# Altium PCB LAY-90818_A.brd.PcbDoc (part 2 of 6)
Units mil, origin at the board's own origin, x right, y up, seen from the top; angles counter-clockwise.
Board outline 4645.67 x 2165.35 mil, 4 copper layers (TOP, GND, POWER, BOTTOM), stack 60.45 mil thick; 414 components, 348 nets, 1441 pads, 720 vias.
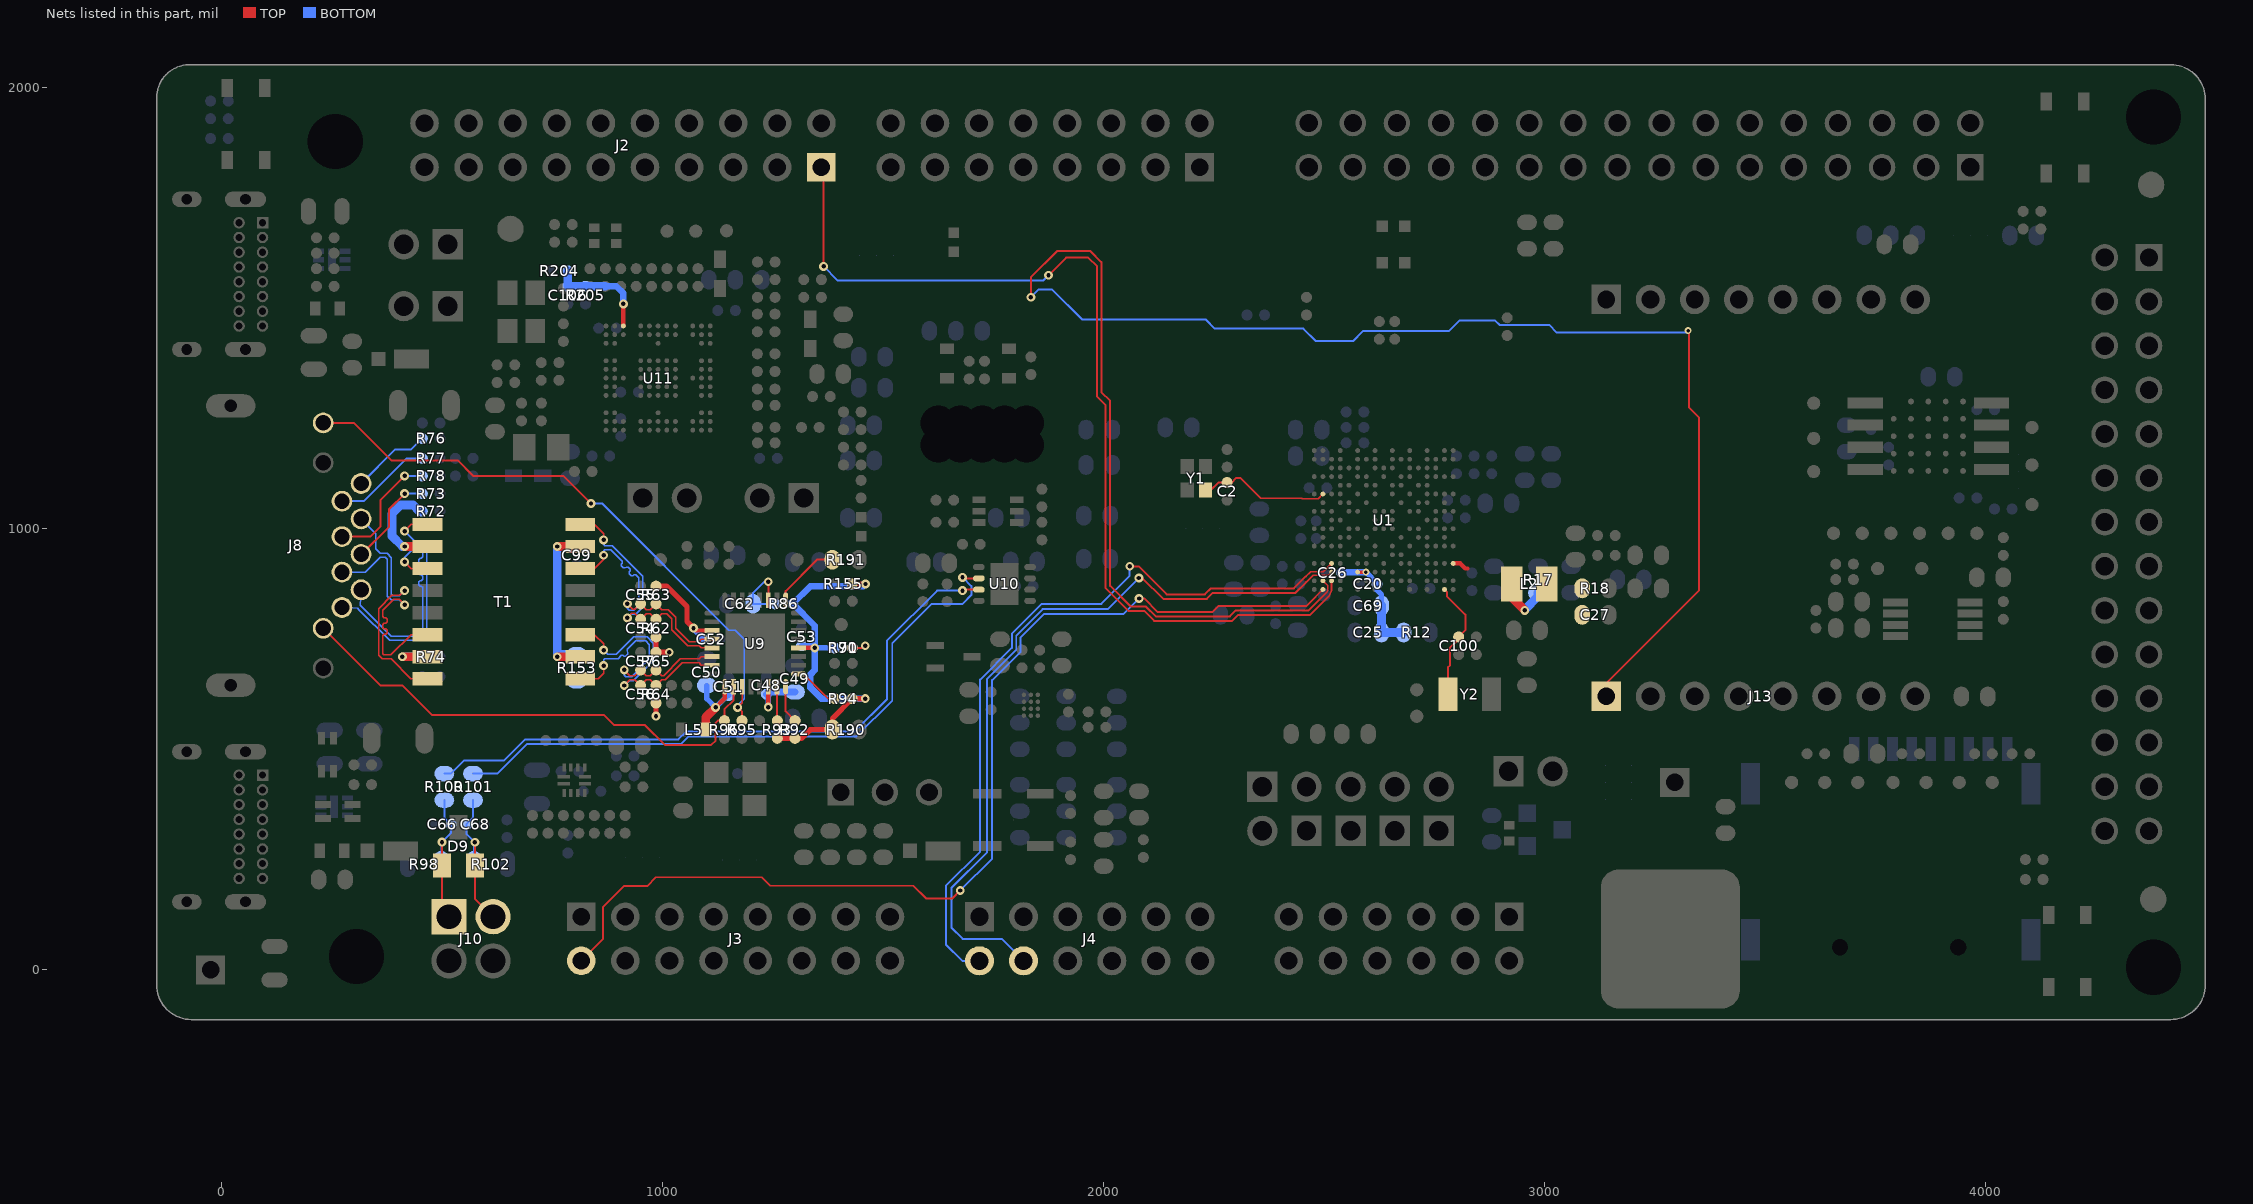
[diagram p4: the nets of this part, all layers, seen from the top]

## Footprints (in the part's own frame and the unit in brackets; to place one, negate y for a bottom-side part, rotate by r counter-clockwise, add the part's x,y. Pads: shape width x height; smd on the part's side, far side on the other; paste and mask are expansions set on the pad)
3PIN_0402_SOLDER_BLOB_JUMPER_SHORT_PSP_A#1 [mil] "3PIN_0402_SOLDER_BLOB_JUMPER_SHORT_PSP_A"
  oct 1x1 smd: 1(0,0) 2(-38.5,0) 3(38.5,0)
  TOP region: 15.72,15 37.53,15 45.03,12.99 50.52,7.5 52.53,0 50.52,-7.5 45.03,-12.99 37.53,-15 37.53,-15 15.72,-15 24.47,0
  TOP region: 15.72,15 37.53,15 45.03,12.99 50.52,7.5 52.53,0 50.52,-7.5 45.03,-12.99 37.53,-15 37.53,-15 15.72,-15 24.47,0
  TOP region: -15.72,-15 -37.53,-15 -45.03,-12.99 -50.52,-7.5 -52.53,0 -50.52,7.5 -45.03,12.99 -37.53,15 -37.53,15 -15.72,15 -24.47,0
  TOP region: -15.72,-15 -37.53,-15 -45.03,-12.99 -50.52,-7.5 -52.53,0 -50.52,7.5 -45.03,12.99 -37.53,15 -37.53,15 -15.72,15 -24.47,0
  TOP region: -8.8,15 -17.5,0 -8.8,-15 8.8,-15 17.5,0 8.8,15
  TOP region: -8.8,15 -17.5,0 -8.8,-15 8.8,-15 17.5,0 8.8,15
  silkscreen extent -60,-22 60,22, body extent -52,-15 52,15, height 150
3PIN_0402_SOLDER_BLOB_JUMPER_SHORT_PSP_A#2 [mil] "3PIN_0402_SOLDER_BLOB_JUMPER_SHORT_PSP_A"
  oct 1x1 smd: 1(0,0) 2(38.5,0) 3(-38.5,0)
  TOP region: 15.72,15 37.53,15 45.03,12.99 50.52,7.5 52.53,0 50.52,-7.5 45.03,-12.99 37.53,-15 37.53,-15 15.72,-15 24.47,0
  TOP region: 15.72,15 37.53,15 45.03,12.99 50.52,7.5 52.53,0 50.52,-7.5 45.03,-12.99 37.53,-15 37.53,-15 15.72,-15 24.47,0
  TOP region: -15.72,-15 -37.53,-15 -45.03,-12.99 -50.52,-7.5 -52.53,0 -50.52,7.5 -45.03,12.99 -37.53,15 -37.53,15 -15.72,15 -24.47,0
  TOP region: -15.72,-15 -37.53,-15 -45.03,-12.99 -50.52,-7.5 -52.53,0 -50.52,7.5 -45.03,12.99 -37.53,15 -37.53,15 -15.72,15 -24.47,0
  TOP region: 8.8,-15 17.5,0 8.8,15 -8.8,15 -17.5,0 -8.8,-15
  TOP region: 8.8,-15 17.5,0 8.8,15 -8.8,15 -17.5,0 -8.8,-15
  silkscreen extent -60,-23 60,23, body extent -52,-15 52,15, height 150
BGA98_0P5_7X7 [mil] "BGA98_0P5_7X7"
  round 11 smd: A1(-118.11,118.11) A2(-98.42,118.11) A3(-78.74,118.11) A5(-39.37,118.11) A6(-19.68,118.11) A7(0,118.11) A8(19.68,118.11) A9(39.37,118.11) A11(78.74,118.11) A12(98.42,118.11) A13(118.11,118.11) B1(-118.11,98.42) B2(-98.42,98.42) B3(-78.74,98.42) B5(-39.37,98.42) B6(-19.68,98.42) B7(0,98.42) B8(19.68,98.42) B9(39.37,98.42) B11(78.74,98.42) B12(98.42,98.42) B13(118.11,98.42) C1(-118.11,78.74) C2(-98.42,78.74) C7(0,78.74) C12(98.42,78.74) C13(118.11,78.74) E1(-118.11,39.37) E2(-98.42,39.37) E5(-39.37,39.37) E6(-19.68,39.37) E7(0,39.37) E8(19.68,39.37) E9(39.37,39.37) E12(98.42,39.37) E13(118.11,39.37) F1(-118.11,19.68) F2(-98.42,19.68) F5(-39.37,19.68) F6(-19.68,19.68) F8(19.68,19.68) F9(39.37,19.68) F12(98.42,19.68) F13(118.11,19.68) G1(-118.11,0) G2(-98.42,0) G3(-78.74,0) G5(-39.37,0) G6(-19.68,0) G8(19.68,0) G9(39.37,0) G11(78.74,0) G12(98.42,0) G13(118.11,0) H1(-118.11,-19.69) H2(-98.42,-19.69) H5(-39.37,-19.69) H6(-19.68,-19.69) H8(19.68,-19.69) H9(39.37,-19.69) H12(98.42,-19.69) H13(118.11,-19.69) J1(-118.11,-39.37) J2(-98.42,-39.37) J5(-39.37,-39.37) J6(-19.68,-39.37) J7(0,-39.37) J8(19.68,-39.37) J9(39.37,-39.37) J12(98.42,-39.37) J13(118.11,-39.37) L1(-118.11,-78.74) L2(-98.42,-78.74) L7(0,-78.74) L12(98.42,-78.74) L13(118.11,-78.74) M1(-118.11,-98.43) M2(-98.42,-98.43) M3(-78.74,-98.43) M5(-39.37,-98.43) M6(-19.68,-98.43) M7(0,-98.43) M8(19.68,-98.43) M9(39.37,-98.43) M11(78.74,-98.43) M12(98.42,-98.43) M13(118.11,-98.43) N1(-118.11,-118.11) N2(-98.42,-118.11) N3(-78.74,-118.11) N5(-39.37,-118.11) N6(-19.68,-118.11) N7(0,-118.11) N8(19.68,-118.11) N9(39.37,-118.11) N11(78.74,-118.11) N12(98.42,-118.11) N13(118.11,-118.11)
  silkscreen extent -193,-145 145,189, body extent -138,-138 138,138, height 150
BGA184_0P5_9X9_SM [mil] "BGA184_0P5_9X9_SM"
  round 11 smd: A1(-157.48,157.48) A2(-137.8,157.48) A4(-98.43,157.48) A6(-59.06,157.48) A8(-19.69,157.48) A10(19.69,157.48) A12(59.06,157.48) A14(98.43,157.48) A16(137.8,157.48) A17(157.48,157.48) B1(-157.48,137.8) B2(-137.8,137.8) B3(-118.11,137.8) B4(-98.43,137.8) B6(-59.06,137.8) B7(-39.37,137.8) B8(-19.69,137.8) B10(19.69,137.8) B11(39.37,137.8) B12(59.06,137.8) B14(98.43,137.8) B15(118.11,137.8) B16(137.8,137.8) B17(157.48,137.8) C3(-118.11,118.11) C4(-98.43,118.11) C5(-78.74,118.11) C6(-59.06,118.11) C8(-19.69,118.11) C9(0,118.11) C10(19.69,118.11) C12(59.06,118.11) C13(78.74,118.11) C14(98.43,118.11) C15(118.11,118.11) D1(-157.48,98.43) D2(-137.8,98.43) D3(-118.11,98.43) D4(-98.43,98.43) D6(-59.06,98.43) D7(-39.37,98.43) D9(0,98.43) D11(39.37,98.43) D12(59.06,98.43) D14(98.43,98.43) D15(118.11,98.43) D16(137.8,98.43) D17(157.48,98.43) E4(-98.43,78.74) E5(-78.74,78.74) E7(-39.37,78.74) E8(-19.69,78.74) E10(19.69,78.74) E11(39.37,78.74) E13(78.74,78.74) E14(98.43,78.74) F1(-157.48,59.06) F2(-137.8,59.06) F3(-118.11,59.06) F4(-98.43,59.06) F6(-59.06,59.06) F8(-19.69,59.06) F10(19.69,59.06) F12(59.06,59.06) F14(98.43,59.06) F15(118.11,59.06) F16(137.8,59.06) F17(157.48,59.06) G2(-137.8,39.37) G4(-98.43,39.37) G5(-78.74,39.37) G7(-39.37,39.37) G11(39.37,39.37) G13(78.74,39.37) G14(98.43,39.37) G16(137.8,39.37) H1(-157.48,19.69) H2(-137.8,19.69) H3(-118.11,19.69) H5(-78.74,19.69) H6(-59.06,19.69) H8(-19.69,19.69) H9(0,19.69) H10(19.69,19.69) H12(59.06,19.69) H13(78.74,19.69) H15(118.11,19.69) H16(137.8,19.69) H17(157.48,19.69) J3(-118.11,0) J4(-98.43,0) J8(-19.69,0) J10(19.69,0) J14(98.43,0) J15(118.11,0) K1(-157.48,-19.69) K2(-137.8,-19.69) K3(-118.11,-19.69) K5(-78.74,-19.69) K6(-59.06,-19.69) K8(-19.69,-19.69) K9(0,-19.69) K10(19.69,-19.69) K12(59.06,-19.69) K13(78.74,-19.69) K15(118.11,-19.69) K16(137.8,-19.69) K17(157.48,-19.69) L2(-137.8,-39.37) L4(-98.43,-39.37) L5(-78.74,-39.37) L7(-39.37,-39.37) L11(39.37,-39.37) L13(78.74,-39.37) L14(98.43,-39.37) L16(137.8,-39.37) M1(-157.48,-59.06) M2(-137.8,-59.06) M3(-118.11,-59.06) M4(-98.43,-59.06) M6(-59.06,-59.06) M8(-19.69,-59.06) M10(19.69,-59.06) M12(59.06,-59.06) M14(98.43,-59.06) M15(118.11,-59.06) M16(137.8,-59.06) M17(157.48,-59.06) N4(-98.43,-78.74) N5(-78.74,-78.74) N7(-39.37,-78.74) N8(-19.69,-78.74) N10(19.69,-78.74) N11(39.37,-78.74) N13(78.74,-78.74) N14(98.43,-78.74) P1(-157.48,-98.43) P2(-137.8,-98.43) P3(-118.11,-98.43) P4(-98.43,-98.43) P6(-59.06,-98.43) P7(-39.37,-98.43) P9(0,-98.43) P11(39.37,-98.43) P12(59.06,-98.43) P14(98.43,-98.43) P15(118.11,-98.43) P16(137.8,-98.43) P17(157.48,-98.43) R3(-118.11,-118.11) R4(-98.43,-118.11) R5(-78.74,-118.11) R6(-59.06,-118.11) R8(-19.69,-118.11) R9(0,-118.11) R10(19.69,-118.11) R12(59.06,-118.11) R13(78.74,-118.11) R14(98.43,-118.11) R15(118.11,-118.11) T1(-157.48,-137.8) T2(-137.8,-137.8) T3(-118.11,-137.8) T4(-98.43,-137.8) T6(-59.06,-137.8) T7(-39.37,-137.8) T8(-19.69,-137.8) T10(19.69,-137.8) T11(39.37,-137.8) T12(59.06,-137.8) T14(98.43,-137.8) T15(118.11,-137.8) T16(137.8,-137.8) T17(157.48,-137.8) U1(-157.48,-157.48) U2(-137.8,-157.48) U4(-98.43,-157.48) U6(-59.06,-157.48) U8(-19.69,-157.48) U10(19.69,-157.48) U12(59.06,-157.48) U14(98.43,-157.48) U16(137.8,-157.48) U17(157.48,-157.48)
  silkscreen extent -246,-184 184,248
CC0402_25#1 [mil] "CC0402_25"
  round 25 smd: 1(-20,0) 2(20,0)
  TOP keep-out region: 5,4 5,-4 4.5,-6.17 3.12,-7.91 1.11,-8.87 -1.11,-8.87 -3.12,-7.91 -4.5,-6.17 -5,-4 -5,-4 -5,4 -4.5,6.17 -3.12,7.91 -1.11,8.87 1.11,8.87 3.12,7.91 4.5,6.17 5,4
  silkscreen extent -4,-12 4,12, body extent -32,-13 32,13, height 150
CC0402_25#2 [mil] "CC0402_25"
  round 25 smd: 1(20,0) 2(-20,0)
  TOP keep-out region: -5,-4 -5,4 -4.5,6.17 -3.12,7.91 -1.11,8.87 1.11,8.87 3.12,7.91 4.5,6.17 5,4 5,4 5,-4 4.5,-6.17 3.12,-7.91 1.11,-8.87 -1.11,-8.87 -3.12,-7.91 -4.5,-6.17 -5,-4
  silkscreen extent -4,-12 4,12, body extent -32,-12 32,12, height 150
CC0603_OV#1 [mil] "CC0603_OV"
  oval 35x45 smd: 1(-30,0) 2(30,0)
  TOP keep-out region: -10,20 10,20 10,-20 -10,-20
  silkscreen extent -5,-25 5,25, body extent -48,-23 48,23, height 150
CC0603_OV#2 [mil] "CC0603_OV"
  oval 35x45 smd: 1(30,0) 2(-30,0)
  TOP keep-out region: 10,-20 -10,-20 -10,20 10,20
  silkscreen extent -5,-25 5,25, body extent -48,-22 48,22, height 150
CC0805_OV [mil] "CC0805_OV"
  oval 35x60 smd: 1(-38,0) 2(38,0)
  TOP keep-out region: 20.47,-4.49 18.52,-13.46 12.84,-20.67 4.59,-24.68 -4.59,-24.68 -12.84,-20.67 -18.52,-13.46 -20.47,-4.49 -20.47,-4.49 -20.47,4.49 -18.52,13.46 -12.84,20.67 -4.59,24.68 4.59,24.68 12.84,20.67 18.52,13.46 20.47,4.49 20.47,4.49
  silkscreen extent -10,-25 10,25, body extent -56,-30 56,30, height 150
CC1206_OV [mil] "CC1206_OV"
  oval 40x70 smd: 1(-60,0) 2(60,0)
  TOP keep-out region: -35,-35 35,-35 35,35 -35,35
  silkscreen extent -15,-30 15,30, body extent -80,-35 80,35, height 150
CON9_SDCARD_1P1_15P05X14P75_SM [mil] "CON9_SDCARD_1P1_15P05X14P75_SM"
  rect 24x55 smd: 1(-82.87,-399.65) 2(-39.57,-399.65) 3(3.74,-399.65) 4(47.05,-399.65) 5(90.35,-399.65) 6(133.66,-399.65) 7(176.97,-399.65) 8(220.28,-399.65) 9(263.58,-399.65)
  rect 43x94 smd: G1(317.91,-320.91) G2(-317.91,-320.91) G3(317.91,33.42) G4(-317.91,33.42)
  round 0 hole 37 unplated: ""(-115.16,50.15) ""(152.56,50.15)
  TOP keep-out region: 296.26,-260.68 296.26,-101.23 -105.32,-101.23 -105.32,-260.68
  BOTTOM keep-out region: 171.63,50.15 170.18,42.86 166.04,36.67 159.86,32.54 152.56,31.09 145.26,32.54 143.19,33.92 143.19,33.92 139.08,36.67 134.94,42.86 133.49,50.15 134.94,57.45 139.08,63.64 143.19,66.38 143.19,66.38 145.26,67.77 152.56,69.22 159.86,67.77 166.04,63.64 170.18,57.45 171.63,50.15
  BOTTOM keep-out region: -96.09,50.15 -97.54,42.86 -101.68,36.67 -107.86,32.54 -115.16,31.09 -122.45,32.54 -124.53,33.92 -124.53,33.92 -128.64,36.67 -132.77,42.86 -134.22,50.15 -132.77,57.45 -128.64,63.64 -124.53,66.38 -124.53,66.38 -122.45,67.77 -115.16,69.22 -107.86,67.77 -101.68,63.64 -97.54,57.45 -96.09,50.15
  Multi-Layer keep-out region: -81.37,50.15 -82.52,41.41 -85.9,33.26 -91.27,26.26 -98.26,20.89 -106.41,17.52 -115.16,16.37 -123.9,17.52 -132.05,20.89 -132.05,20.89 -139.05,26.26 -144.42,33.26 -147.79,41.41 -148.95,50.15 -147.79,58.9 -144.42,67.05 -139.05,74.05 -132.05,79.42 -132.05,79.42 -123.9,82.79 -115.16,83.94 -106.41,82.79 -98.26,79.42 -91.27,74.05 -85.9,67.05 -82.52,58.9 -81.37,50.15
  Multi-Layer keep-out region: 186.35,50.15 185.2,41.41 181.82,33.26 176.45,26.26 169.45,20.89 161.3,17.52 152.56,16.37 143.81,17.52 135.66,20.89 135.66,20.89 128.67,26.26 123.3,33.26 119.92,41.41 118.77,50.15 119.92,58.9 123.3,67.05 128.67,74.05 135.66,79.42 135.66,79.42 143.81,82.79 152.56,83.94 161.3,82.79 169.45,79.42 176.45,74.05 181.82,67.05 185.2,58.9 186.35,50.15
  silkscreen extent -304,-382 304,208, body extent -339,-427 339,427, height 150
CON12P_1P02_16P48X15P5_RA_TH [mil] "CON12P_1P02_16P48X15P5_RA_TH"
  round 47 hole 35: 1(140.55,212.62) 2(100.39,255.93) 3(60.24,212.62) 4(20.08,255.93) 5(-20.08,212.62) 6(-60.24,255.93) 7(-100.39,212.62) 8(-140.55,255.93) 9(-277.95,170.1) 10(-187.79,170.1) 11(187.8,170.1) 12(277.95,170.1)
  oval 53x112 hole 28 slot 87 at 90 deg: S1(316.54,-39.35) S2(-316.54,-39.35)
  BOTTOM keep-out region: -272.39,-207.69 -272.39,17.45 -293.73,27.87 -308.05,46.81 -312.27,70.18 -305.47,92.93 -289.12,110.16 -266.75,118.13 -266.75,118.13 266.78,118.13 290.55,112.28 308.86,96.03 317.51,73.13 314.49,48.83 300.52,28.73 278.8,17.45 278.8,17.45 278.8,-207.69
  BOTTOM keep-out region: -20.08,351.32 -0.41,357.38 20.08,359.43 20.08,359.43 20.09,359.43 40.57,357.38 60.24,351.32 60.24,351.32 79.91,357.38 100.39,359.43 100.39,359.43 100.39,359.43 137.9,352.39 170.31,332.24 193.21,301.72 193.21,301.72 214.03,285.52 230.07,264.57 230.07,264.57 231.48,263.93 232.87,263.27 232.87,263.27 254.83,270.98 277.95,273.6 277.94,273.6 277.95,273.6 317.56,265.72 351.14,243.29 373.57,209.71 381.45,170.1 381.45,170.1 372.26,127.46 346.33,92.4 346.33,92.4 386.17,70.74 413.38,34.46 423.03,-9.85 423.04,-9.84 423.04,-68.85 408.77,-122.1 369.78,-161.08 316.54,-175.35 263.29,-161.08 224.3,-122.1 210.04,-68.85 210.04,-68.85 210.04,-9.84 219.84,34.78 247.44,71.2 247.44,71.2 240.05,73.79 232.87,76.93 232.87,76.93 210.92,69.22 187.8,66.6 187.8,66.6 187.8,66.6 136.87,79.99 99.13,116.71 99.13,116.71 80.05,111.03 60.24,109.12 60.24,109.12 60.23,109.12 39.75,111.17 20.08,117.23 20.08,117.23 0.41,111.17 -20.08,109.12 -20.08,109.12 -40.56,111.17 -60.24,117.23 -60.24,117.23 -79.91,111.17 -100.39,109.12 -100.39,109.12 -100.39,109.12 -102.26,109.14 -104.12,109.19 -104.12,109.19 -140.85,77.86 -187.8,66.6 -187.79,66.6 -187.8,66.6 -210.92,69.22 -232.87,76.93 -232.87,76.93 -240.05,73.79 -247.44,71.2 -247.44,71.2 -219.84,34.78 -210.04,-9.85 -210.04,-9.85 -210.04,-68.85 -224.3,-122.1 -263.29,-161.08 -316.54,-175.35 -369.79,-161.08 -408.77,-122.1 -423.04,-68.85 -423.04,-68.85 -423.04,-9.85 -413.38,34.46 -386.17,70.74 -346.33,92.4 -346.33,92.4 -372.26,127.46 -381.45,170.1 -381.45,170.1 -373.57,209.71 -351.14,243.29 -317.56,265.72 -277.95,273.6 -277.95,273.6 -260.42,272.1 -243.39,267.66 -243.39,267.65 -226.01,314.31 -188.87,347.45 -140.55,359.43 -140.55,359.43 -140.54,359.43 -120.06,357.38 -100.39,351.32 -100.39,351.32 -80.72,357.38 -60.24,359.43 -60.24,359.43 -39.75,357.38 -20.08,351.32
  Multi-Layer keep-out region: -270.47,128.13 263.63,128.13 290.85,121.72 312.35,103.84 323.63,78.25 322.31,50.31 308.68,25.89 285.59,10.12 285.59,10.12 285.59,-217.69 -285.59,-217.69 -285.59,9.99 -308.35,24.82 -322.44,48.04 -325.06,75.08 -315.71,100.58 -296.23,119.51 -270.47,128.13
  silkscreen extent -331,-366 331,258, body extent -343,-359 343,279, height 150
CON16_USB_TYPE-C_RA_TH [mil] "CON16_USB_TYPE-C_RA_TH"
  rect 26x26 hole 16: A1(-117.13,125.94)
  round 26 hole 16: A4(-83.66,125.94) A5(-50.2,125.94) A6(-16.73,125.94) A7(16.73,125.94) A8(50.2,125.94) A9(83.66,125.94) A12(117.13,125.94) B1(117.13,72.79) B4(83.66,72.79) B5(50.2,72.79) B6(16.73,72.79) B7(-16.73,72.79) B8(-50.2,72.79) B9(-83.66,72.79) B12(-117.13,72.79)
  oval 35x94 hole 24 slot 83 at 90 deg: SH1(-170.28,87.36) SH2(170.28,87.36)
  oval 35x67 hole 24 slot 55 at 90 deg: SH3(-170.28,-45.71) SH4(170.28,-45.71)
  BOTTOM keep-out region: -72.78,-61.71 -85.84,-110.46 -121.53,-146.15 -170.28,-159.21 -219.03,-146.15 -254.71,-110.46 -267.78,-61.71 -267.78,-61.71 -267.78,-29.71 -265.14,-7.21 -257.39,14.07 -257.39,14.07 -265.14,35.36 -267.78,57.86 -267.78,57.86 -267.78,116.86 -260.7,153.32 -240.51,184.49 -210.13,205.84 -210.13,205.84 -210.13,218.94 -84.16,218.94 -83.66,218.94 -83.16,218.94 -83.16,218.94 -50.83,218.94 -50.2,218.94 -49.56,218.94 -49.56,218.94 -24.13,218.94 -24.13,218.65 -12.02,218.82 0,217.42 0,217.42 16.74,218.94 33.47,217.42 33.47,217.42 50.2,218.94 66.93,217.42 66.93,217.42 83.66,218.94 100.39,217.42 100.39,217.42 126.14,218.5 151.2,212.47 151.2,212.47 193.93,211.44 232.11,192.24 258.41,158.56 267.78,116.86 267.78,116.86 267.78,57.86 265.14,35.36 257.39,14.07 257.39,14.07 265.14,-7.21 267.78,-29.71 267.78,-29.71 267.78,-61.71 254.71,-110.46 219.03,-146.15 170.28,-159.21 121.53,-146.15 85.84,-110.46 72.78,-61.71 72.78,-61.71 72.78,-29.71 72.91,-24.67 73.3,-19.63 73.3,-19.63 70.1,-19.22 66.93,-18.69 66.93,-18.69 50.19,-20.21 33.46,-18.69 33.46,-18.69 16.73,-20.21 0,-18.69 0,-18.69 -16.74,-20.21 -33.47,-18.69 -33.47,-18.69 -50.2,-20.21 -66.93,-18.69 -66.93,-18.69 -70.11,-19.22 -73.3,-19.63 -73.3,-19.63 -72.91,-24.67 -72.78,-29.71 -72.78,-29.71
  silkscreen extent -195,-226 195,161, body extent -188,-219 188,154, height 150
CON_1X8_SKT_2P54_TH_126L [mil] "CON_1X8_SKT_2P54_TH_126L"
  rect 67x67 / inner round 67 / far side rect 67x67 hole 40: 1(0.05,349.98)
  round 67 hole 40: 2(0.05,249.98) 3(0.05,149.98) 4(0.05,49.98) 5(0.05,-50.02) 6(0.05,-150.02) 7(0.05,-250.02) 8(0.05,-350.02)
  BOTTOM keep-out region: -33.47,-383.49 33.54,-383.49 33.54,383.59 -33.47,383.59
  silkscreen extent -59,-422 59,422, body extent -52,-415 52,415, height 150
CON_2X8_SKT_100_TH [mil] "CON_2X8_SKT_100_TH"
  rect 65x65 / inner round 65 / far side rect 65x65 hole 40: 1(-350,50)
  round 65 hole 40: 2(-350,-50) 3(-250,50) 4(-250,-50) 5(-150,50) 6(-150,-50) 7(-50,50) 8(-50,-50) 9(50,50) 10(50,-50) 11(150,50) 12(150,-50) 13(250,50) 14(250,-50) 15(350,50) 16(350,-50)
  BOTTOM keep-out region: -462.5,-162.5 462.5,-162.5 462.5,162.5 -462.5,162.5
  silkscreen extent -422,-110 422,110, body extent -415,-103 415,105, height 150
CON_SKT2X6_TH_126L [mil] "CON_SKT2X6_TH_126L"
  rect 66x66 / inner round 66 / far side rect 66x66 hole 41: 1(250,-50)
  round 66 hole 41: 2(250,50) 3(150,-50) 4(150,50) 5(50,-50) 6(50,50) 7(-50,-50) 8(-50,50) 9(-150,-50) 10(-150,50) 11(-250,-50) 12(-250,50)
  BOTTOM keep-out region: -363,-163 363,-163 363,163 -363,163
  silkscreen extent -323,-112 323,112, body extent -316,-104 316,104, height 150
CON_SKT2X10_TH [mil] "CON_SKT2X10_TH"
  rect 65x65 / inner round 65 / far side rect 65x65 hole 40: 1(50,450)
  round 65 hole 40: 2(-50,450) 3(50,350) 4(-50,350) 5(50,250) 6(-50,250) 7(50,150) 8(-50,150) 9(50,50) 10(-50,50) 11(50,-50) 12(-50,-50) 13(50,-150) 14(-50,-150) 15(50,-250) 16(-50,-250) 17(50,-350) 18(-50,-350) 19(50,-450) 20(-50,-450)
  BOTTOM keep-out region: -162.5,-562.5 162.5,-562.5 162.5,562.5 -162.5,562.5
  silkscreen extent -110,-522 110,522, body extent -103,-514 103,515, height 150
CON_SKT2X14_TH_126L [mil] "CON_SKT2X14_TH_126L"
  rect 61x61 / inner round 61 / far side rect 61x61 hole 41: 1(50,650)
  round 61 hole 41: 2(-50,650) 3(50,550) 4(-50,550) 5(50,450) 6(-50,450) 7(50,350) 8(-50,350) 9(50,250) 10(-50,250) 11(50,150) 12(-50,150) 13(50,50) 14(-50,50) 15(50,-50) 16(-50,-50) 17(50,-150) 18(-50,-150) 19(50,-250) 20(-50,-250) 21(50,-350) 22(-50,-350) 23(50,-450) 24(-50,-450) 25(50,-550) 26(-50,-550) 27(50,-650) 28(-50,-650)
  BOTTOM lines w1: -160.5,-760.5 -160.5,760.5 160.5,760.5 160.5,-760.5 -160.5,-760.5
  silkscreen extent -110,-722 110,722
CON_SKT_32F_100_TH [mil] "CON_SKT_32F_100_TH"
  rect 60x60 / inner round 60 / far side rect 60x60 hole 41: 1(50,750)
  round 60 hole 41: 2(-50,750) 3(50,650) 4(-50,650) 5(50,550) 6(-50,550) 7(50,450) 8(-50,450) 9(50,350) 10(-50,350) 11(50,250) 12(-50,250) 13(50,150) 14(-50,150) 15(50,50) 16(-50,50) 17(50,-50) 18(-50,-50) 19(50,-150) 20(-50,-150) 21(50,-250) 22(-50,-250) 23(50,-350) 24(-50,-350) 25(50,-450) 26(-50,-450) 27(50,-550) 28(-50,-550) 29(50,-650) 30(-50,-650) 31(50,-750) 32(-50,-750)
  BOTTOM keep-out region: -160,-860 160,-860 160,860 -160,860
  silkscreen extent -110,-822 110,822, body extent -103,-815 103,815, height 150
ELECTRODE_8MM_SQ_CIR [mil] "ELECTRODE_8MM_SQ_CIR"
  rrect25% 314.96x314.96 smd: 1(0,0)
  silkscreen extent -164,-164 164,164, body extent -157,-157 157,157, height 150
HDR1X2_5P48X2P69#1 [mil] "HDR1X2_5P48X2P69"
  rect 69x69 / inner round 69 / far side rect 69x69 hole 44: 1(-50,0)
  round 69 hole 44: 2(50,0)
  BOTTOM keep-out region: 15.2,0 16.39,-9.01 19.86,-17.4 25.39,-24.61 32.6,-30.14 40.99,-33.61 50,-34.8 59.01,-33.61 67.4,-30.14 67.4,-30.14 74.61,-24.61 80.14,-17.4 83.61,-9.01 84.8,0 83.61,9.01 80.14,17.4 74.61,24.61 67.4,30.14 67.4,30.14 59.01,33.61 50,34.8 40.99,33.61 32.6,30.14 25.39,24.61 19.86,17.4 16.39,9.01 15.2,0
  BOTTOM keep-out region: -84.5,-34.5 -15.5,-34.5 -15.5,34.5 -84.5,34.5
  silkscreen extent -115,-60 115,60, body extent -108,-53 108,53, height 150
HDR1X2_5P48X2P69#2 [mil] "HDR1X2_5P48X2P69"
  rect 69x69 / inner round 69 / far side rect 69x69 hole 44: 1(-50,0)
  round 69 hole 44: 2(50,0)
  BOTTOM lines w1: -84.5,-34.5 -84.5,34.5 -15.5,34.5 -15.5,-34.5 -84.5,-34.5
  BOTTOM keep-out region: 84.8,0 83.61,9.01 80.14,17.4 74.61,24.61 67.4,30.14 59.01,33.61 50,34.8 40.99,33.61 32.6,30.14 32.6,30.14 25.39,24.61 19.86,17.4 16.39,9.01 15.2,0 16.39,-9.01 19.86,-17.4 25.39,-24.61 32.6,-30.14 32.6,-30.14 40.99,-33.61 50,-34.8 59.01,-33.61 67.4,-30.14 74.61,-24.61 80.14,-17.4 83.61,-9.01 84.8,0
  silkscreen extent -115,-60 115,60
HDR2X2_2P54_TH [mil] "HDR2X2_2P54_TH"
  rect 80x80 / inner round 80 / far side rect 80x80 hole 56: 1(-50,50)
  round 80 hole 56: 2(50,50) 3(-50,-50) 4(50,-50)
  BOTTOM keep-out region: -90,90 -90,10 -10,10 -10,90
  BOTTOM keep-out region: -9.65,-50 -11.03,-39.56 -15.06,-29.83 -21.47,-21.47 -29.83,-15.06 -39.56,-11.03 -50,-9.65 -60.44,-11.03 -70.17,-15.06 -70.17,-15.06 -78.53,-21.47 -84.94,-29.83 -88.97,-39.56 -90.35,-50 -88.97,-60.44 -84.94,-70.17 -78.53,-78.53 -70.17,-84.94 -70.17,-84.94 -60.44,-88.97 -50,-90.35 -39.56,-88.97 -29.83,-84.94 -21.47,-78.53 -15.06,-70.17 -11.03,-60.44 -9.65,-50
  BOTTOM keep-out region: 90.35,50 88.97,60.44 84.94,70.17 78.53,78.53 70.17,84.94 60.44,88.97 50,90.35 39.56,88.97 29.83,84.94 29.83,84.94 21.47,78.53 15.06,70.17 11.03,60.44 9.65,50 11.03,39.56 15.06,29.83 21.47,21.47 29.83,15.06 29.83,15.06 39.56,11.03 50,9.65 60.44,11.03 70.17,15.06 78.53,21.47 84.94,29.83 88.97,39.56 90.35,50
  BOTTOM keep-out region: 90.35,-50 88.97,-39.56 84.94,-29.83 78.53,-21.47 70.17,-15.06 60.44,-11.03 50,-9.65 39.56,-11.03 29.83,-15.06 29.83,-15.06 21.47,-21.47 15.06,-29.83 11.03,-39.56 9.65,-50 11.03,-60.44 15.06,-70.17 21.47,-78.53 29.83,-84.94 29.83,-84.94 39.56,-88.97 50,-90.35 60.44,-88.97 70.17,-84.94 78.53,-78.53 84.94,-70.17 88.97,-60.44 90.35,-50
  silkscreen extent -107,-107 107,107, body extent -100,-100 100,100, height 150
HDR101 [mil] "HDR101"
  rect 66x66 / inner round 66 / far side rect 66x66 hole 40: 1(0,0)
  BOTTOM keep-out region: -33,-33 33,-33 33,33 -33,33
  silkscreen extent -57,-57 57,57, body extent -50,-50 50,50, height 150
HDR103 [mil] "HDR103"
  rect 60x60 / inner round 60 / far side rect 60x60 hole 40: 1(0,99.75)
  round 60 hole 40: 2(0,-0.25) 3(0,-100.25)
  BOTTOM keep-out region: -30,129.75 -30,-100.25 -27.03,-113.27 -18.7,-123.7 -6.68,-129.5 6.68,-129.5 18.7,-123.7 27.03,-113.27 30,-100.25 30,-100.25 30,129.75
  silkscreen extent -57,-167 57,167, body extent -50,-160 50,160, height 150
HDR_5X2_FTSH_TH [mil] "HDR_5X2_FTSH_TH"
  oval 56x40 hole 80: 1(-25,100) 2(25,100) 3(-25,50) 4(25,50) 5(-25,0) 6(25,0) 7(-25,-50) 8(25,-50) 9(-25,-100) 10(25,-100)
  BOTTOM keep-out region: -61,-120 61,-120 61,120 -61,120
  silkscreen extent -77,-134 77,134, body extent -70,-127 70,127, height 150
IND4_CHOKE_0805_39H [mil] "IND4_CHOKE_0805_39H"
  rect 36x16 smd: 1(-33.46,-15.75) 2(33.47,-15.75) 3(33.47,15.75) 4(-33.46,15.75)
  silkscreen extent -50,-35 50,35, body extent -51,-28 51,28, height 150
IND_1P8X1MM_SM [mil] "IND_1P8X1MM_SM"
  rect 39x28 smd: 1(-33.28,0) 2(33.28,0)
  silkscreen extent -41,-27 41,27, body extent -53,-20 53,20, height 150
IND_0402 [mil] "IND_0402"
  round 25 smd: 1(-20,0) 2(20,0)
  silkscreen extent -12,-18 13,18
IND_0805 [mil] "IND_0805"
  rect 51x59 smd: 1(-38.5,0) 2(38.5,0)
  silkscreen extent -13,-42 13,42, body extent -64,-32 64,32, height 150
IND_1608 [mil] "IND_1608"
  rect 24x32 smd: 1(-27.65,0) 2(27.55,0)
  silkscreen extent -32,-26 30,26
IND_SPH2520 [mil] "IND_SPH2520"
  rect 48x79 smd: 1(-39.75,0) 2(39.75,0)
  silkscreen extent -55,-50 52,50, body extent -64,-43 64,43, height 150
LED4_2P7X2P6_SM [mil] "LED4_2P7X2P6_SM"
  rect 26x26 smd: 1(-41.3,-25.6) 2(41.3,-25.6) 3(41.3,25.6) 4(-41.3,25.6)
  silkscreen extent -60,-56 60,56, body extent -54,-49 54,49, height 150
LED_1P1_1P1X0P6_SM [mil] "LED_1P1_1P1X0P6_SM"
  rect 24x24 smd: A(21.65,0) C(-21.65,0)
  silkscreen extent -29,-63 29,19, body extent -34,-12 34,12, height 150
LED_1X0P6_SM [mil] "LED_1X0P6_SM"
  rect 20x24 smd: A(17.72,0) C(-17.72,0)
  silkscreen extent -28,-63 31,20, body extent -28,-13 28,13, height 150
MH125-160 [mil] "MH125-160"
  round 0 hole 125 unplated: 1(0,0)
  BOTTOM keep-out region: 62.8,0 61.6,12.25 58.02,24.03 52.22,34.89 44.41,44.41 34.89,52.22 24.03,58.02 12.25,61.6 0,62.8 -12.25,61.6 -24.03,58.02 -31.27,54.16 -31.27,54.16 -34.89,52.22 -44.41,44.41 -52.22,34.89 -58.02,24.03 -61.6,12.25 -62.8,0 -61.6,-12.25 -58.02,-24.03 -52.22,-34.89 -44.41,-44.41 -34.89,-52.22 -31.27,-54.16 -31.27,-54.16 -24.03,-58.02 -12.25,-61.6 0,-62.8 12.25,-61.6 24.03,-58.02 34.89,-52.22 44.41,-44.41 52.22,-34.89 58.02,-24.03 61.6,-12.25 62.8,0
  Multi-Layer keep-out region: 80.39,0 78.84,15.68 74.27,30.76 66.84,44.66 56.84,56.84 44.66,66.84 30.76,74.27 15.68,78.84 0,80.39 -15.68,78.84 -30.76,74.27 -40.02,69.32 -40.02,69.32 -44.66,66.84 -56.84,56.84 -66.84,44.66 -74.27,30.76 -78.84,15.68 -80.39,0 -78.84,-15.68 -74.27,-30.76 -66.84,-44.66 -56.84,-56.84 -44.66,-66.84 -40.02,-69.32 -40.02,-69.32 -30.76,-74.27 -15.68,-78.84 0,-80.39 15.68,-78.84 30.76,-74.27 44.66,-66.84 56.84,-56.84 66.84,-44.66 74.27,-30.76 78.84,-15.68 80.39,0
  Multi-Layer keep-out region: 80.39,0 78.84,15.68 74.27,30.76 66.84,44.66 56.84,56.84 44.66,66.84 30.76,74.27 15.68,78.84 0,80.39 -15.68,78.84 -30.76,74.27 -40.02,69.32 -40.02,69.32 -44.66,66.84 -56.84,56.84 -66.84,44.66 -74.27,30.76 -78.84,15.68 -80.39,0 -78.84,-15.68 -74.27,-30.76 -66.84,-44.66 -56.84,-56.84 -44.66,-66.84 -40.02,-69.32 -40.02,-69.32 -30.76,-74.27 -15.68,-78.84 0,-80.39 15.68,-78.84 30.76,-74.27 44.66,-66.84 56.84,-56.84 66.84,-44.66 74.27,-30.76 78.84,-15.68 80.39,0
  body extent -63,-63 63,63, height 150
OSC4_3P2X2P5_SM [mil] "OSC4_3P2X2P5_SM"
  rect 55x47 smd: 1(-43.29,-37.4) 2(43.33,-37.4) 3(43.33,37.4) 4(-43.29,37.4)
  silkscreen extent -78,-68 78,68, body extent -71,-61 71,61, height 150
PBGA24_1_6X8MM [mil] "PBGA24_1_6X8MM"
  round 13 smd: A2(-39.37,78.74) A3(0,78.74) A4(39.37,78.74) A5(78.74,78.74) B1(-78.74,39.37) B2(-39.37,39.37) B3(0,39.37) B4(39.37,39.37) B5(78.74,39.37) C1(-78.74,0) C2(-39.37,0) C3(0,0) C4(39.37,0) C5(78.74,0) D1(-78.74,-39.37) D2(-39.37,-39.37) D3(0,-39.37) D4(39.37,-39.37) D5(78.74,-39.37) E1(-78.74,-78.74) E2(-39.37,-78.74) E3(0,-78.74) E4(39.37,-78.74) E5(78.74,-78.74)
  silkscreen extent -127,-166 127,166
QFN32EP [mil] "QFN32EP"
  oval 35x11 smd: 1(-98.01,68.95) 8(-98.01,-68.95) 17(98.01,-68.95) 24(98.01,68.95)
  rect 35x11 smd: 2(-98.01,49.25) 3(-98.01,29.55) 4(-98.01,9.85) 5(-98.01,-9.85) 6(-98.01,-29.55) 7(-98.01,-49.25) 18(98.01,-49.25) 19(98.01,-29.55) 20(98.01,-9.85) 21(98.01,9.85) 22(98.01,29.55) 23(98.01,49.25)
  oval 11x35 smd: 9(-68.95,-98.01) 16(68.95,-98.01) 25(68.95,98.01) 32(-68.95,98.01)
  rect 11x35 smd: 10(-49.25,-98.01) 11(-29.55,-98.01) 12(-9.85,-98.01) 13(9.85,-98.01) 14(29.55,-98.01) 15(49.25,-98.01) 26(49.25,98.01) 27(29.55,98.01) 28(9.85,98.01) 29(-9.85,98.01) 30(-29.55,98.01) 31(-49.25,98.01)
  rect 136x136 smd: 33(0,0)
  silkscreen extent -126,-126 125,126, body extent -116,-116 116,116, height 150
R603-X2 [mil] "R603-X2"
  oval 35x45 smd: 1(-60,0) 2(0,0) 3(60,0)
  TOP keep-out region: 20,-20 20,20 40,20 40,-20
  TOP keep-out region: -40,-20 -40,20 -20,20 -20,-20
  Multi-Layer keep-out region: -60,-25 -60,25 0,25 0,-25
  silkscreen extent -85,-30 85,30, body extent -85,-30 85,30, height 150
RC0402_25#1 [mil] "RC0402_25"
  round 25 smd: 1(-20,0) 2(20,0)
  TOP keep-out region: 5,4 5,-4 4.5,-6.17 3.12,-7.91 1.11,-8.87 -1.11,-8.87 -3.12,-7.91 -4.5,-6.17 -5,-4 -5,-4 -5,4 -4.5,6.17 -3.12,7.91 -1.11,8.87 1.11,8.87 3.12,7.91 4.5,6.17 5,4
  body extent -32,-12 32,12, height 150
RC0402_25#2 [mil] "RC0402_25"
  round 25 smd: 1(20,0) 2(-20,0)
  TOP keep-out region: -5,-4 -5,4 -4.5,6.17 -3.12,7.91 -1.11,8.87 1.11,8.87 3.12,7.91 4.5,6.17 5,4 5,4 5,-4 4.5,-6.17 3.12,-7.91 1.11,-8.87 -1.11,-8.87 -3.12,-7.91 -4.5,-6.17 -5,-4
  body extent -32,-12 32,12, height 150
RC0603_OV#1 [mil] "RC0603_OV"
  oval 35x45 smd: 1(-30,0) 2(30,0)
  TOP keep-out region: -10,20 10,20 10,-20 -10,-20
  silkscreen extent -5,-5 5,5, body extent -48,-23 48,23, height 150
RC0603_OV#2 [mil] "RC0603_OV"
  oval 35x45 smd: 1(30,0) 2(-30,0)
  TOP keep-out region: 10,-20 -10,-20 -10,20 10,20
  silkscreen extent -5,-5 5,5, body extent -48,-22 48,22, height 150
RC0805_OV#1 [mil] "RC0805_OV"
  oval 35x60 smd: 1(-38,0) 2(38,0)
  TOP keep-out region: -20,25 20,25 20,-25 -20,-25
  silkscreen extent -10,-25 10,25, body extent -56,-30 56,30, height 150
RC0805_OV#2 [mil] "RC0805_OV"
  oval 35x60 smd: 1(38,0) 2(-38,0)
  TOP keep-out region: 20,-25 -20,-25 -20,25 20,25
  silkscreen extent -10,-25 10,25, body extent -56,-30 56,30, height 150
SKT2X6_100_TH_RA [mil] "SKT2X6_100_TH_RA"
  rect 65x65 / inner round 65 / far side rect 65x65 hole 40: 1(-194.54,250)
  round 65 hole 40: 2(-94.54,250) 3(-194.54,150) 4(-94.54,150) 5(-194.54,50) 6(-94.54,50) 7(-194.54,-50) 8(-94.54,-50) 9(-194.54,-150) 10(-94.54,-150) 11(-194.54,-250) 12(-94.54,-250)
  BOTTOM keep-out region: -307.04,-362.5 17.96,-362.5 17.96,362.5 -307.04,362.5
  silkscreen extent -42,-324 314,324, body extent -227,-317 307,317, height 150
SLP1616P6 [mm] "SLP1616P6"
  rect 0.305x0.635 smd: 1(-0.5,-0.76) 2(0,-0.76) 3(0.5,-0.76) 4(0.5,0.76) 5(0,0.76) 6(-0.5,0.76)
  rect 1.295x0.457 smd: 7(0,0)
  silkscreen extent -1.1,-0.91 1.03,0.91, body extent -0.85,-1.08 0.85,1.08, height 3.81
SMB_2P7X1P4 [mil] "SMB_2P7X1P4"
  rect 32x32 smd: A(49.15,-0.59)
  rect 79x43 smd: C(-25.65,-0.59)
  silkscreen extent -173,-34 53,35, body extent -65,-28 65,28, height 150
SO8_W [mil] "SO8_W"
  rect 80x25 smd: 1(-143,75) 2(-143,25) 3(-143,-25) 4(-143,-75) 5(143,-75) 6(143,-25) 7(143,25) 8(143,75)
  silkscreen extent -115,-116 115,116, body extent -183,-112 183,112, height 150
SOD523 [mil] "SOD523"
  rect 24x32 smd: A(33.46,-0.19) C(-33.46,-0.19)
  silkscreen extent -47,-24 43,94, body extent -45,-17 45,17, height 150
SOD882 [mil] "SOD882"
  rect 16x28 smd: 1(-13.78,0) 2(13.78,0)
  silkscreen extent -139,-20 28,119
SON8_0P65_3P15X3P15 [mm] "SON8_0P65_3P15X3P15"
  oval 0.675x0.35 smd: 1(-1.475,0.975) 2(-1.475,0.325) 3(-1.475,-0.325) 4(-1.475,-0.975) 5(1.475,-0.975) 6(1.475,-0.325) 7(1.475,0.325) 8(1.475,0.975)
  rect 1.6x2.413 smd: 9(0,0)
  TOP region: -0.962,-1.15 -1.637,-1.15 -1.637,-0.8 -0.962,-0.8
  TOP region: -0.962,-0.5 -1.637,-0.5 -1.637,-0.15 -0.962,-0.15
  TOP region: -0.962,0.15 -1.637,0.15 -1.637,0.5 -0.962,0.5
  TOP region: -0.962,0.8 -1.637,0.8 -1.637,1.15 -0.962,1.15
  TOP region: 0.962,-0.8 1.637,-0.8 1.637,-1.15 0.962,-1.15
  TOP region: 0.962,-0.15 1.637,-0.15 1.637,-0.5 0.962,-0.5
  TOP region: 0.962,0.5 1.637,0.5 1.637,0.15 0.962,0.15
  TOP region: 0.962,1.15 1.637,1.15 1.637,0.8 0.962,0.8
  silkscreen extent -1.75,-1.75 1.77,1.75, body extent -1.9,-1.58 1.9,1.58, height 3.81
SOT23-40X40 [mil] "SOT23-40X40"
  rect 40x40 smd: 1(-36.96,-39.5) 2(37.04,-39.5) 3(0.04,39.5)
  silkscreen extent -67,-27 67,35, body extent -60,-59 60,59, height 150
SOT89-5 [mil] "SOT89-5"
  rect 22x65 smd: 1(-59.1,-59.1) 3(59.1,-59.1)
  oct 1x1 smd: 2(0,0)
  rect 22x60 smd: 4(59.1,61.6) 5(-59.1,61.6)
  TOP region: 34.4,-18.3 34.4,73.8 12.2,73.8 12.2,91.5 -12.2,91.5 -12.2,73.8 -34.4,73.8 -34.4,-18.3 -12.2,-40.4 -12.2,-91.5 12.2,-91.5 12.2,-40.4
  TOP region: 34.4,-18.3 34.4,73.8 12.2,73.8 12.2,91.5 -12.2,91.5 -12.2,73.8 -34.4,73.8 -34.4,-18.3 -12.2,-40.4 -12.2,-91.5 12.2,-91.5 12.2,-40.4
  silkscreen extent -98,-58 98,58, body extent -91,-92 91,92, height 150
SOT323_3 [mil] "SOT323_3"
  rect 16x39 smd: 1(25.59,-41.73) 2(-25.59,-41.73) 3(0,41.73)
  silkscreen extent -47,-28 47,28, body extent -42,-61 42,61, height 150
SOT-23 [mil] "SOT-23"
  rect 40x55 smd: 1(-37.4,-43.3) 2(37.4,-43.3) 3(0,43.3)
  silkscreen extent -65,-34 65,34, body extent -63,-71 63,71, height 150
SOT-363_0P65_SMT [mil] "SOT-363_0P65_SMT"
  rect 30x15 smd: 1(-42.72,25.59) 2(-42.72,0) 3(-42.72,-25.59) 4(42.72,-25.59) 5(42.72,0) 6(42.72,25.59)
  silkscreen extent -34,-50 34,50, body extent -58,-43 58,43, height 150
SW4_4P15_4P2X3P2_SM [mil] "SW4_4P15_4P2X3P2_SM"
  rect 41x26 smd: 1(-81.69,42.32) 2(81.69,42.32) 3(-81.69,-42.32) 4(81.69,-42.32)
  silkscreen extent -92,-70 87,70, body extent -102,-63 102,63, height 150
TPAD_030 [mil] "TPAD_030"
  round 30 smd: 1(0,0)
  silkscreen extent -25,-25 25,25, body extent -15,-15 15,15, height 150
TSSOP8_A [mil] "TSSOP8_A"
  rect 57x18 smd: 1(-84.65,38.39) 2(-84.65,12.79) 3(-84.65,-12.79) 4(-84.65,-38.39) 5(84.65,-38.39) 6(84.65,-12.79) 7(84.65,12.79) 8(84.65,38.39)
  silkscreen extent -72,-68 68,70, body extent -113,-61 113,61, height 150
WLCSP12_0P4_1P38X1P68MM_SMDP [mil] "WLCSP12_0P4_1P38X1P68MM_SMDP"
  round 10 smd: A1(-15.75,23.62) A2(0,23.62) A3(15.75,23.62) B1(-15.75,7.87) B2(0,7.87) B3(15.75,7.87) C1(-15.75,-7.87) C2(0,-7.87) C3(15.75,-7.87) D1(-15.75,-23.62) D2(0,-23.62) D3(15.75,-23.62)
  silkscreen extent -34,-40 34,40, body extent -27,-33 27,33, height 150
X2QFN12_0P4_1P6X1P6 [mil] "X2QFN12_0P4_1P6X1P6"
  rect 28x8 smd: 1(-23.84,7.87) 2(-23.84,-7.87) 7(23.84,-7.87) 8(23.84,7.87)
  rect 8x18 smd: 3(-23.62,-28.54) 4(-7.87,-28.54) 5(7.87,-28.54) 6(23.62,-28.54) 9(23.62,28.54) 10(7.87,28.54) 11(-7.87,28.54) 12(-23.62,28.54)
  silkscreen extent -45,-45 45,45
XFMR16_1P27_13P05X7P15 [mil] "XFMR16_1P27_13P05X7P15"
  rect 30x67 smd: 1(-175,-173.23) 2(-125,-173.23) 3(-75,-173.23) 4(-25,-173.23) 5(25,-173.23) 6(75,-173.23) 7(125,-173.23) 8(175,-173.23) 9(175,173.23) 10(125,173.23) 11(75,173.23) 12(25,173.23) 13(-25,173.23) 14(-75,173.23) 15(-125,173.23) 16(-175,173.23)
  silkscreen extent -264,-148 264,148, body extent -257,-207 257,207, height 150
XTAL2-3P2X1P5-SM [mil] "XTAL2-3P2X1P5-SM"
  rect 43x75 smd: 1(-49.21,0.02) 2(49.21,0.02)
  silkscreen extent -82,-48 82,48, body extent -71,-38 71,38, height 150
XTAL4_2P1X1P7MM_SM [mil] "XTAL4_2P1X1P7MM_SM"
  rect 34x30 smd: 1(-26.58,-20.67) 2(26.58,-20.67) 3(26.58,20.67) 4(-26.58,20.67)
  silkscreen extent -53,-46 54,46, body extent -44,-36 44,36, height 150
XTAL4_3P4X2P7_SM [mil] "XTAL4_3P4X2P7_SM"
  rect 55x45 smd: 1(-43.31,-31.5) 2(43.31,-31.5) 3(43.31,31.5) 4(-43.31,31.5)
  silkscreen extent -80,-63 80,63, body extent -71,-54 71,54, height 150

## Free pads (board coordinates)
  round 60 smd: ""(655,1680) ""(4375,1780) ""(4380,160)

## Via types
v1: diameter 20, hole 10, TOP to BOTTOM, 483 vias
v2: diameter 16, hole 8, TOP to BOTTOM, 215 vias
v3: diameter 18, hole 8, TOP to BOTTOM, 13 vias
v4: diameter 20, hole 10.1, TOP to BOTTOM, 9 vias

## Nets (pads, with @x,y where several pads share a name; then routed paths per layer and width w, separated by ;. In a path a pad name is that pad's centre, name@x,y a point inside that pad or via, vN(x,y) a via of type N, cw(c..) or ccw(c..) an arc to the next point about the centre after c; other vN are vias at no path point)
ADC0_A0/ARD_A0: J4.2 U1.P3 | length 1714.1
  TOP w4: 2458.51,892 2469.38,902.87 2498.19,902.87 U1.P3@2516.89,921.57
  TOP w4.4: v1(2059,915) 2079.24,915 2142.94,851.3 2229.73,851.3 2243.43,865 2431.51,865 2458.51,892
  BOTTOM w4.4: J4.2@1718.5,20.5 1679.5,20.5 1642.5,57.5 1642.5,190.5 1720,268 1720,658.08 1791.8,729.88 1791.8,762.22 1859.58,830 1995,830 2059,894 v1(2059,915)
ADC0_B0/ARD_A1: J4.4 U1.R3 | length 1732
  TOP w4: 2459,879 2474.87,894.87 2509.87,894.87 U1.R3@2516.89,901.89
  TOP w4.4: v1(2080,888.5) 2087.89,888.5 2135.09,841.3 2233.87,841.3 2247.57,855 2435,855 2459,879
  BOTTOM w4.4: J4.4@1818.5,20.5 1769,70 1680,70 1655,95 1655,185.74 1735,265.74 1735,658.94 1801.8,725.74 1801.8,758.07 1861.73,818 2009.5,818 v1(2080,888.5)
ADC1_B0/MC_BEMF_A: J2.1 U1.T3 | length 2223.7
  TOP w4: 2468.44,805 2511.42,847.99 2516.89,861.18 U1.T3@2516.89,882.2
  TOP w4.4: J2.1@1360,1820 1365,1815 v1(1365,1595) ; v1(1875,1575) 1915,1615 1965,1615 1985,1595 1985,1300 2004.42,1280.58 2004.42,865.58 2056.1,813.9 2091.68,813.9 2114.28,791.3 2291.3,791.3 2305,805 2468.44,805
  BOTTOM w4.4: v1(1365,1595) 1396.4,1563.6 1863.6,1563.6 v1(1875,1575)
AGND: C20.2 C25.2 C26.2 C69.2 R12.2 U1.R6 | length 275.3
  TOP w8: U1.R6@2575.94,901.89 v2(2594.44,901.89)
  BOTTOM w12: v2(2594.44,901.89) 2620,876.33 C20.2@2620,875 2620,861 2630,851 C69.2@2630,826
  BOTTOM w15: C26.2@2540,900 2541.89,901.89 v2(2594.44,901.89)
  BOTTOM w20: C69.2@2630,826 C25.2@2630,765 R12.2@2680,765
ANA_4/ADC1_A0: J13.1 U1.T2 | length 4062.7
  TOP w4: 2465,815 2506.14,856.14 2507.9,860.39 2507.9,871.5 U1.T2@2497.2,882.2
  TOP w4.4: v1(1835,1525) 1835,1570 1895,1630 1970,1630 1995,1605 1995,1310 2014.42,1290.58 2014.42,870.58 2061.1,823.9 2095.82,823.9 2118.43,801.3 2286.3,801.3 2300,815 2465,815 ; J13.1@3140.04,620.11 3140.04,650.04 3350.4,860.4 3350.4,1252.03 3326.8,1275.63 3326.8,1448.2 v2(3325.3,1449.7)
  BOTTOM w4.4: v1(1835,1525) 1853.2,1543.2 1882.54,1543.2 1951.06,1474.68 2231.8,1474.68 2252.3,1454.18 2453.01,1454.18 2481.26,1425.93 2565.6,1425.93 2588,1448.33 2782.25,1448.33 2806.32,1472.4 2887.6,1472.4 2897.6,1462.4 3010.03,1462.4 3027.43,1445 3320.6,1445 v2(3325.3,1449.7)
ANA_6/ADC0_A3: J3.2 U1.U2 | length 2394.8
  TOP w4: 2466.34,831.66 U1.U2@2497.2,862.52
  TOP w4.4: J3.2@815.5,20.5 865,70 865,143 912,190 964.88,190 984.88,210 1224.86,210 1244.13,190.73 1568.53,190.73 1597.46,161.8 1656.8,161.8 v1(1675,180) ; v1(2080.26,842.1) 2091.77,842.1 2122.57,811.3 2246.3,811.3 2260,825 2459.68,825 2466.34,831.66
  BOTTOM w4.4: v1(1675,180) 1747,252 1747,656.79 1811.8,721.6 1811.8,753.93 1864.81,806.94 2045.1,806.94 v1(2080.26,842.1)
CAN_H: C66.1 D9.1 J10.1 R98.1 R100.2 | length 336
  TOP w4.4: v1(499.6,289.6) D9.1@499.6,236.7 499.6,136.4 J10.1@515.5,120.5
  BOTTOM w4.4: R98.1@498,240 498,288 v1(499.6,289.6) 520,310 C66.1@520,330 505,345 R100.2@505,385
CAN_L: C68.1 D9.2 J10.2 R101.2 R102.2 | length 346.2
  TOP w4.4: v1(574.4,289.4) D9.2@574.4,236.7 574.4,161.6 J10.2@615.5,120.5
  BOTTOM w4.4: R101.2@570,385 570,345 C68.1@555,330 555,308.8 v1(574.4,289.4) 572,287 R102.2@572,240
CANH: R100.1 U10.7 | length 1462.6
  TOP w4.4: v1(1680,860) 1682.2,862.21 U10.7@1716.93,862.21
  BOTTOM w4.4: R100.1@505,445 520,445 550,475 640.86,475 688.36,522.5 1035.5,522.5 1053,540 1435,540 1509.19,614.19 1509.19,747.05 1622.14,860 v1(1680,860)
CANL: R101.1 U10.6 | length 1460
  TOP w4.4: v1(1680,890) 1682.2,887.79 U10.6@1716.93,887.79
  BOTTOM w4.4: R101.1@570,445 625,445 692.5,512.5 1042.5,512.5 1059.55,529.55 1439.55,529.55 1520.67,610.67 1520.67,740.67 1610,830 1680,830 1700,850 1700,870 v1(1680,890)
DBGIF_VREF: C106.1 R204.2 R205.1 U11.L1 | length 241.6
  TOP w10: U11.L1@910.96,1460.01 v1(910.96,1510)
  BOTTOM w15: 870,1550 895,1550 910.96,1534.04 v1(910.96,1510)
  BOTTOM w20: R204.2@785,1585 C106.1@785,1550 R205.1@825,1550 870,1550
DCDC_LX: L2.1 R17.1 U1.P17 | length 162.1
  TOP w10: U1.P17@2792.48,921.57 2808.43,921.57 2820,910 2825,910
  TOP w20: L2.1@2925.25,875 2925.25,844.75 v1(2955,815)
  BOTTOM w20: v1(2955,815) 2955,816.77 2985,846.77 R17.1@2985,855
DCDC_VDD_CORE: C27.1 L2.2 R18.1
ENET_CON_NC4: J8.4 R73.1 | length 219.3
  TOP w4.4: J8.4@316.18,942.17 317.17,942.17 380,1005 380,1045 v1(415,1080)
  BOTTOM w4.4: v1(415,1080) R73.1@455,1080
ENET_CON_NC5: J8.5 R78.1 | length 274.3
  TOP w4.4: J8.5@272.87,982.33 337.33,982.33 360,1005 360,1065 v1(415,1120)
  BOTTOM w4.4: v1(415,1120) R78.1@455,1120
ENET_CON_NC7: J8.7 R77.1 | length 222.5
  BOTTOM w4.4: J8.7@272.87,1062.64 322.64,1062.64 420,1160 R77.1@455,1160
ENET_CON_NC8: J8.8 R76.1 | length 181.2
  BOTTOM w4.4: J8.8@316.18,1102.8 393.38,1180 430,1180 R76.1@455,1205
ENET_CON_RXN: J8.6 T1.8 | length 559
  TOP w3.15: v1(415,860) 404.1,849.1 386.23,849.1 355.9,818.77 355.9,713.38 364.38,704.9 384.1,704.9 429,660 T1.8@466.77,660
  BOTTOM w3.15: J8.6@316.18,1022.48 350,988.66 350,955 360,945 375,945 385,935 385,851.46 388.15,848.31 403.31,848.31 v1(415,860)
ENET_CON_RXP: J8.3 T1.6 | length 560.7
  TOP w3.15: v1(415,827.53) 402.53,840 390,840 365,815 365,801.7 368.15,798.55 371.85,798.55 375,795.4 375,789.1 371.85,785.95 368.15,785.95 365,782.8 365,776.5 368.15,773.35 371.85,773.35 375,770.2 375,763.9 371.85,760.75 368.15,760.75 365,757.6 365,717.15 368.15,714 384,714 430,760 T1.6@466.77,760
  BOTTOM w3.15: J8.3@272.87,902.01 326.11,902.01 360,935.9 371.23,935.9 375.9,931.23 375.9,847.69 384.38,839.21 403.31,839.21 v1(415,827.53)
ENET_CON_TXN: J8.2 T1.3 | length 541.8
  TOP w3.15: v1(415,925) 430,910 T1.3@466.77,910
  BOTTOM w3.15: J8.2@316.18,861.85 314.85,826.55 317.87,823.29 385.16,756 438.13,756 455.9,773.77 455.9,867.05 452.75,870.2 450.15,870.2 447,873.35 447,879.65 450.15,882.8 452.75,882.8 455.9,885.95 455.9,892.25 452.75,895.4 450.15,895.4 447,898.55 447,904.85 450.15,908 452.75,908 455.9,911.15 455.9,917.45 452.75,920.6 450.15,920.6 447,923.75 447,930.05 450.15,933.2 452.75,933.2 455.9,936.35 455.9,952.47 452.75,955.62 435.47,955.62 415,935.14 v1(415,925)
ENET_CON_TXP: J8.1 T1.1 | length 542.5
  TOP w3.15: v1(415,995) 430,1010 T1.1@466.77,1010
  BOTTOM w3.15: J8.1@272.87,821.7 308.17,820.36 311.32,816.97 381.39,746.9 441.9,746.9 465,770 465,956.24 456.24,965 445,965 v1(415,995)
ENET_CT1: R72.1 T1.2 | length 223.8
  TOP w20: v1(415,960) T1.2@466.77,960
  BOTTOM w20: v1(415,960) 410,960 386,984 386,1034 406,1054 434.29,1054 448.29,1040 R72.1@455,1040
ENET_CT2: R74.1 T1.7 | length 101.8
  TOP w20: v1(410,710) T1.7@466.77,710
  BOTTOM w20: v1(410,710) R74.1@455,710
ENET_CT3&4: C99.1 R153.2 T1.10 T1.15 | length 444.5
  TOP w20: v1(761,710) T1.10@813.23,710 ; v1(761,960) T1.15@813.23,960
  BOTTOM w20: R153.2@805,715 766,715 v1(761,710) v1(761,960) C99.1@805,960
ENET_LED1/REGOFF: J8.9 R95.2 U9.3 | length 1404.4
  TOP w4.4: J8.9@230.35,1240.2 299.8,1240.2 385,1155 535,1155 570,1120 775,1120 v1(837.49,1057.51) ; R95.2@1180,565 1180,585 v1(1170,595) 1180.45,605.45 U9.3@1180.45,641.99
  BOTTOM w4.4: v1(837.49,1057.51) 862.49,1057.51 1150,770 1165,770 1185,750 1185,615 1170,600 v1(1170,595)
ENET_LED2/INTSEL_B: J8.11 R96.2 U9.2 | length 1151
  TOP w4.4: J8.11@230.35,774.45 359.8,645 410,645 477.2,577.8 867.2,577.8 890,555 960,555 1005,510 1110,510 1120,520 1120,560 1125,565 R96.2@1140,565 1140,590.74 1160.75,611.49 U9.2@1160.75,641.99
ENET_MDC: R191.2 U9.17 | length 156.4
  TOP w4.4: U9.17@1278.95,838.01 1278.95,858.95 1350,930 R191.2@1385,930
ENET_PHYAD0: R70.1 R91.2 | length 63.1
  TOP w4.4: R70.1@1430,730 1454.5,730 v1(1459.5,735)
  BOTTOM w4.4: R91.2@1430,730 1454.5,730 v1(1459.5,735)
ENET_PHYAD1: R93.2 U9.7 | length 77.3
  TOP w4.4: U9.7@1259.25,641.99 1259.25,565.75 R93.2@1260,565
ENET_PHYAD2: R92.2 U9.8 | length 85.7
  TOP w4.4: U9.8@1278.95,641.99 1278.95,586.05 R92.2@1300,565
ENET_RMIISEL: R94.2 U9.9 | length 105.2
  TOP w4.4: U9.9@1308.01,671.05 1319.02,671.05 1375.07,615 R94.2@1390,615
ENET_RST_B: C62.1 R86.2 U9.19 | length 161.9
  TOP w4.4: U9.19@1239.55,838.01 v1(1239.55,880)
  BOTTOM w4.4: v1(1239.55,880) 1230,880 1205,855 C62.1@1205,830 R86.2@1255,830
ENET_RXN: C57.1 R65.2 T1.9 U9.30 | length 587.1
  TOP w3.15: T1.9@813.23,660 854,660 866,672 v1(866,690) ; v1(912.82,680.18) 925.95,667.05 937.05,667.05 C57.1@950,680 962.95,667.05 972.05,667.05 R65.2@985,680 997.95,667.05 1002.2,667.05 1040.3,705.15 1082.61,705.15 1087.91,710.45 U9.30@1111.99,710.45
  BOTTOM w3.15: v1(866,690) 866,702.85 869.15,706 898.87,706 905.99,713.12 910.44,713.12 912.05,711.51 916.51,711.51 920.97,715.97 920.97,720.42 919.35,722.03 919.35,726.48 938.77,745.9 961.23,745.9 970,737.13 970,705 930,665 915.97,665 912.82,668.15 v1(912.82,680.18)
ENET_RXP: C56.1 R64.2 T1.11 U9.31 | length 588.4
  TOP w3.15: T1.11@813.23,760 845,760 866,739 v1(866,725) ; v1(912.82,644.82) 925.95,657.95 937.05,657.95 C56.1@950,645 962.95,657.95 972.05,657.95 R64.2@985,645 997.95,657.95 1005.97,657.95 1044.07,696.05 1082.61,696.05 1087.91,690.75 U9.31@1111.99,690.75
  BOTTOM w3.15: v1(866,725) 875.9,715.1 895.1,715.1 935,755 965,755 979.1,740.9 979.1,701.23 933.77,655.9 923.9,655.9 v1(912.82,644.82)
ENET_TXN: C55.1 R63.2 T1.14 U9.28 | length 581.5
  TOP w3.15: T1.14@813.23,910 845,910 866,931 v1(866,940) ; v1(920,830) 932.77,817.23 937.23,817.23 C55.1@950,830 962.95,817.05 972.05,817.05 R63.2@985,830 997.95,817.05 1012.95,817.05 1030,800 1030,775 1060.45,744.55 1082.61,744.55 1087.91,749.85 U9.28@1111.99,749.85
  BOTTOM w3.15: v1(866,940) 866,949.8 869.15,952.95 882.05,952.95 908.28,926.72 908.28,922.26 906.24,920.22 906.24,915.76 910.7,911.3 915.15,911.3 917.2,913.35 921.65,913.35 926.11,908.89 926.11,904.44 924.06,902.39 924.06,897.94 928.51,893.49 932.97,893.49 935.01,895.53 939.47,895.53 945.9,889.1 945.9,825.9 935,815 924.46,815 920,819.46 v1(920,830)
ENET_TXP: C54.1 R62.2 T1.16 U9.29 | length 584.5
  TOP w3.15: T1.16@813.23,1010 845,1010 866,989 v1(866,975) ; v1(920,798) 930.13,808.13 936.87,808.13 C54.1@950,795 962.95,807.95 972.05,807.95 R62.2@985,795 997.95,807.95 1009.18,807.95 1020.9,796.23 1020.9,771.23 1056.68,735.45 1082.61,735.45 1087.91,730.15 U9.29@1111.99,730.15
  BOTTOM w3.15: v1(866,975) 866,965.2 869.15,962.05 885.82,962.05 955,892.87 955,822.13 938.77,805.9 927.9,805.9 v1(920,798)
EPHY_VDDA: C50.1 C51.1 C52.1 L5.2 R62.1 R63.1 R64.1 R65.1 R153.1 U9.1 U9.27 | length 530.5
  TOP w10: v1(1070,775) 1075.45,769.55 U9.27@1111.99,769.55 ; v1(1120,595) 1141.05,616.05 U9.1@1141.05,641.99
  TOP w12: v1(985,575.5) R64.1@985,605 ; R62.1@985,755 R65.1@985,720 v1(1015,720) ; R63.1@985,870 1008.5,870 1055,823.5 1055,790 v1(1070,775)
  TOP w20: L5.2@1097.6,545 1097.6,572.6 v1(1120,595)
  BOTTOM w12: C50.1@1100,645 1100,615 v1(1120,595) 1147,622 C51.1@1150,622
  BOTTOM w15: v1(1070,775) 1090,755 C52.1@1090,750
EPHY_VDDCR_1V2: C48.1 C49.1 U9.6 | length 144.2
  TOP w10: v1(1239.55,595.85) U9.6@1239.55,641.99
  BOTTOM w12: C48.1@1235,625 1239.55,620.45 v1(1239.55,595.85)
  BOTTOM w15: C48.1@1235,625 1240,630 C49.1@1300,630
EPHY_VDDIO: C53.1 R86.1 R91.1 R92.1 R93.1 R94.1 R155.1 R190.1 U9.12 | length 929
  TOP w10: U9.12@1308.01,730.15 v1(1345,730.15)
  TOP w12: R93.1@1260,525 R92.1@1300,525 1315,525 1335,545 R190.1@1385,545 1385,570 R94.1@1430,615 v1(1459.5,615) ; R155.1@1430,875 v1(1460,875)
  BOTTOM w12: C53.1@1315,735 1340.15,735 v1(1345,730.15) 1370,730.15 1370.15,730 R91.1@1390,730
  BOTTOM w15: v1(1459.5,615) 1360,615 1335,640 1335,670 1345,680 v1(1345,730.15) 1345,780.36 1295.36,830 R86.1@1295,830 1335,870 1455,870 v1(1460,875)
EXTAL: C2.1 U1.F2 Y1.3 | length 301.3
  TOP w4: 2445,1069.37 2449.15,1069.37 2450.13,1068.39 2458.32,1068.39 ; 2458.35,1068.36 2486.5,1068.36 U1.F2@2497.2,1079.06
  TOP w4.4: Y1.3@2230.67,1088.42 2243.43,1088.42 2260,1105 C2.1@2280,1105 2290,1105 2300,1115 2310.86,1115 2356.49,1069.37 2445,1069.37
EXTAL32K: C100.1 U1.U16 Y2.2 | length 273.7
  TOP w4.4: U1.U16@2772.8,862.52 2778.48,856.84 2778.48,847.38 2820.43,805.43 2820.43,770.43 C100.1@2805,755 2805,750 2785,730 2785,690 2780.79,685.79 Y2.2@2780.79,625